# EAGLE board BlackBoard-Artemis-ATP-Panel (EAGLE 9.4.0), part 1 of 4
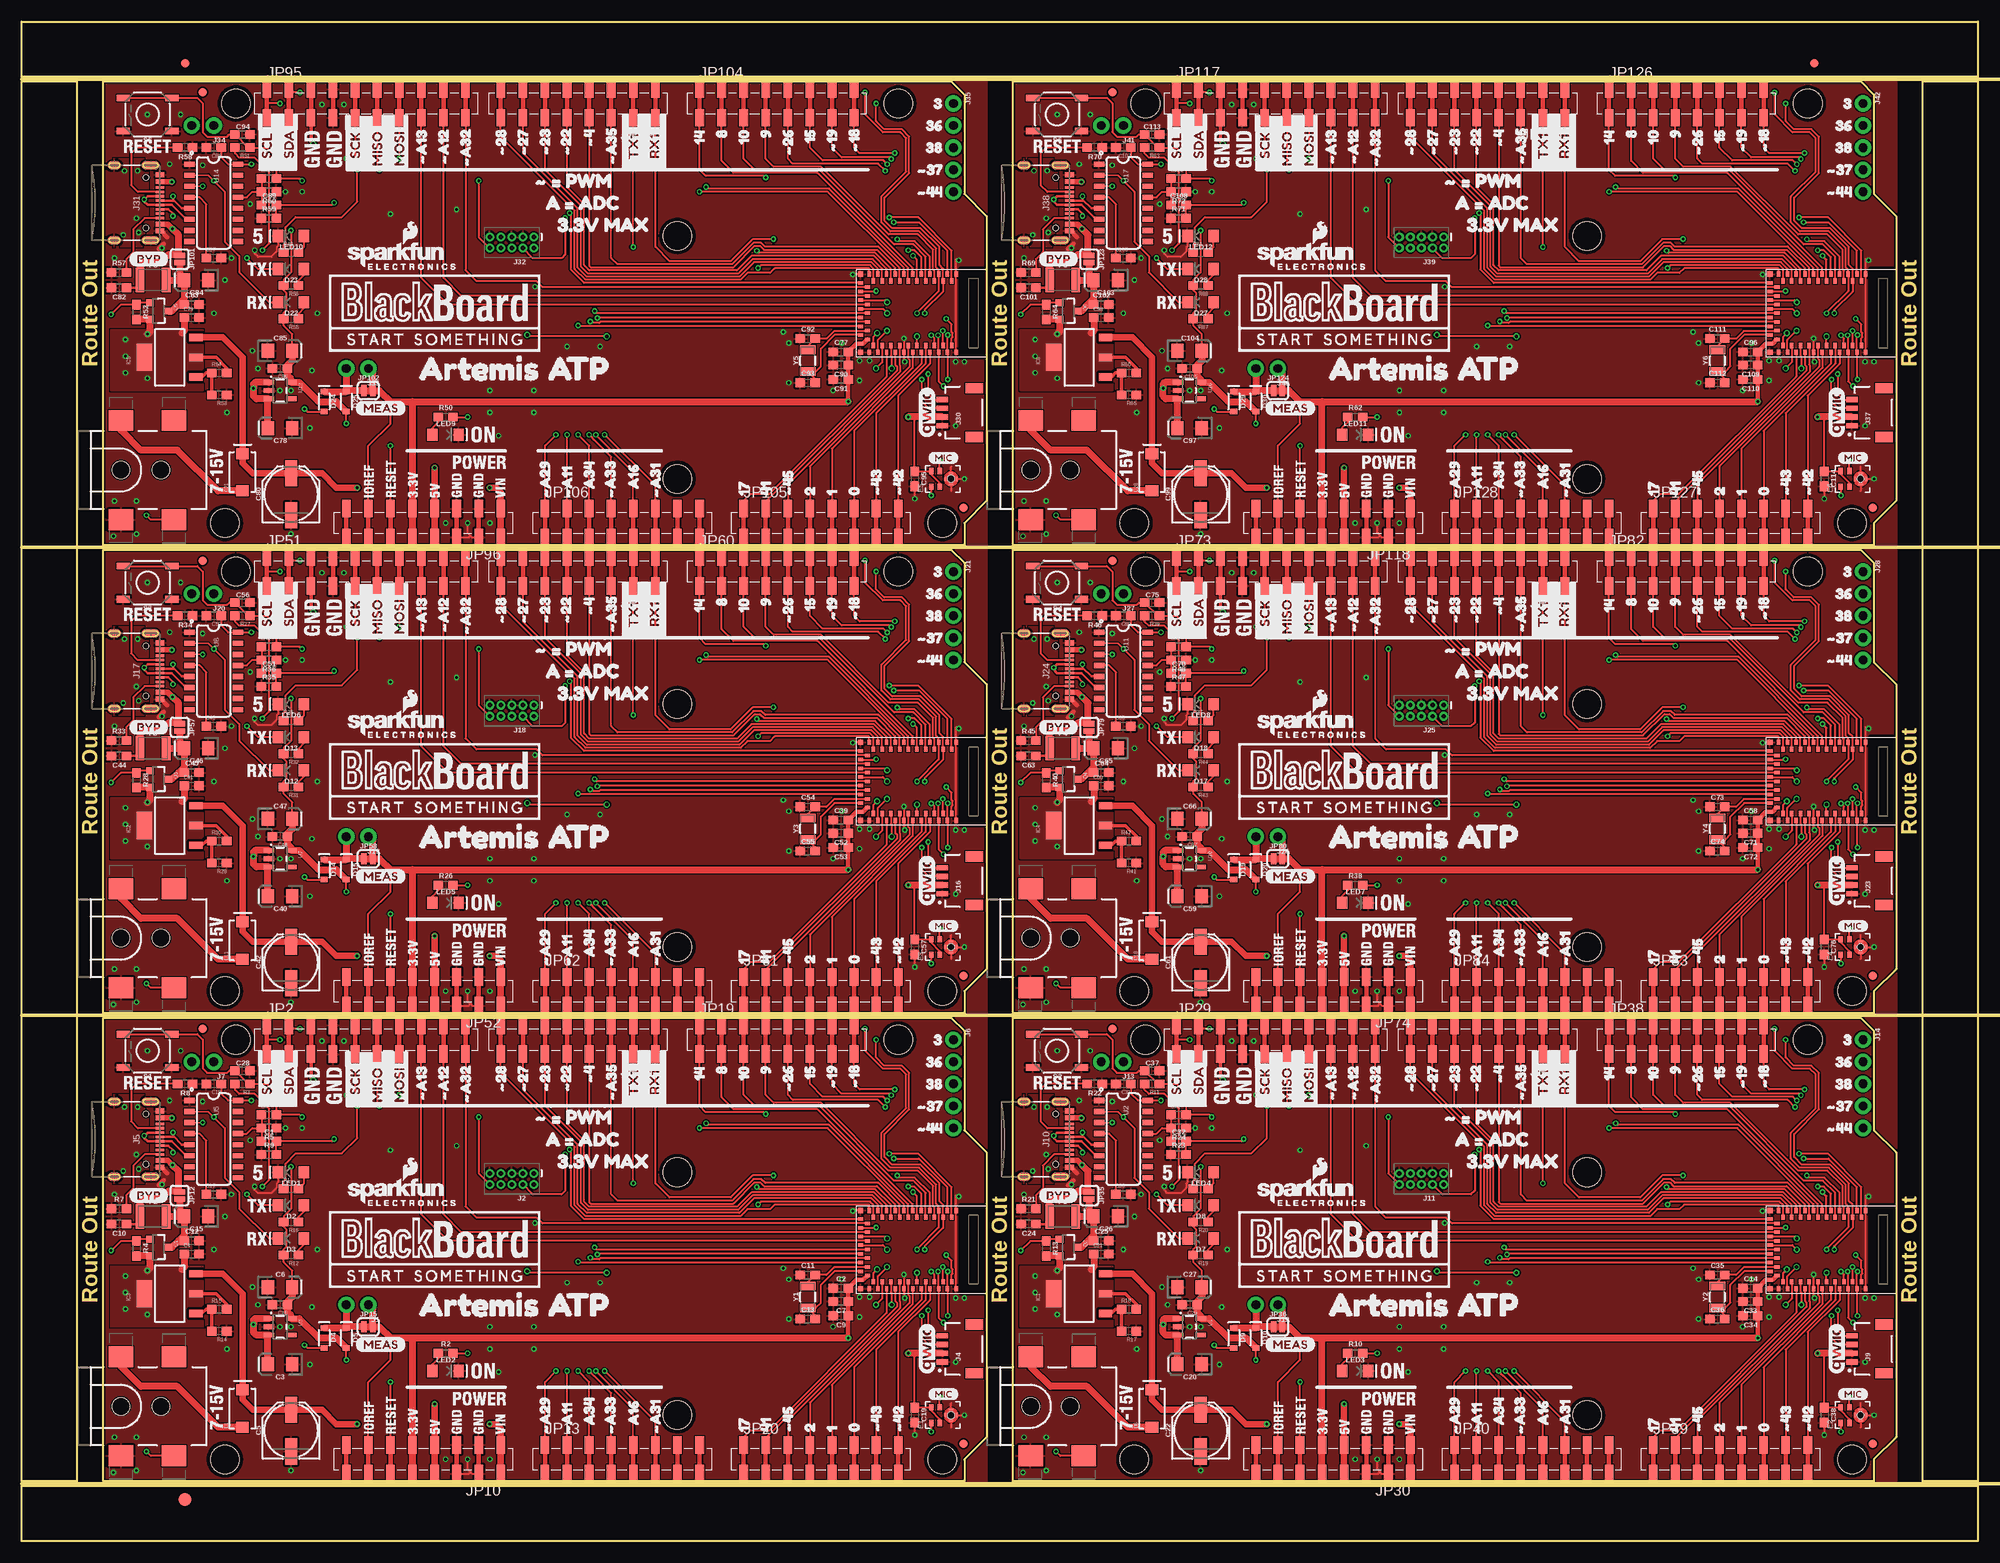
[diagram p0: board, top side]
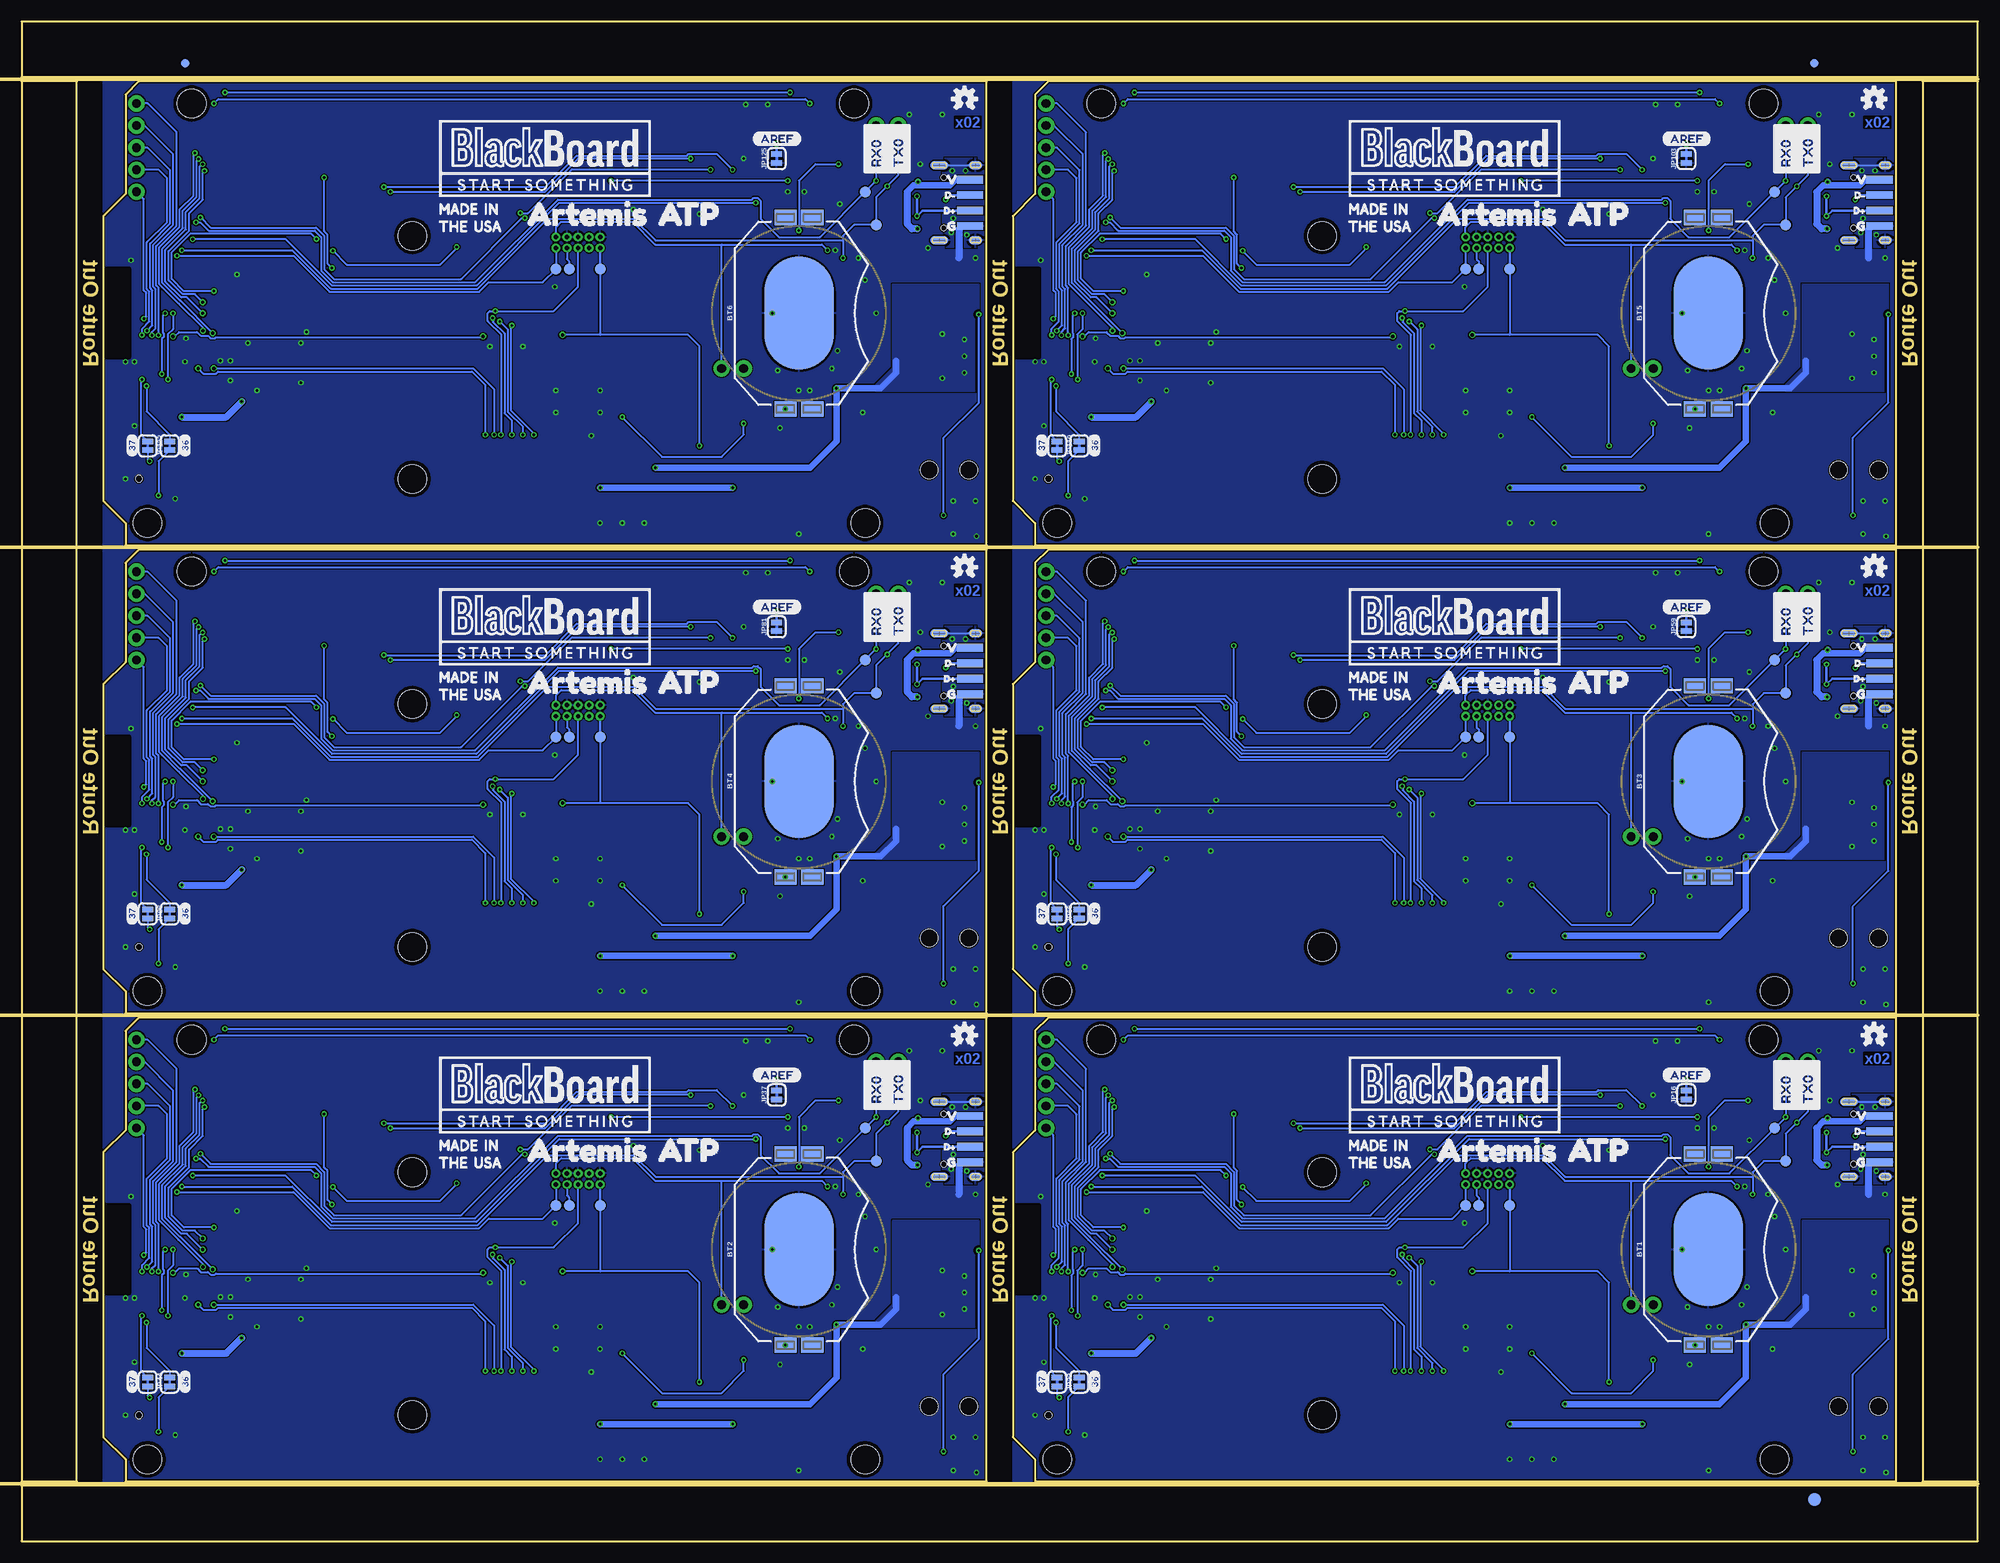
[diagram p1: board, bottom side, seen from below]

Size 225.04 x 174.75 mm. Coordinates in mm from the lower left corner, seen from the top.
Outline: 9.4,60.2 106.93,60.2 108.46,58.67 108.46,47.24 111,44.7 111,11.94 108.46,9.4 108.46,6.86 9.4,6.86 9.4,60.2
Outline: 114.05,60.2 211.58,60.2 213.11,58.67 213.11,47.24 215.65,44.7 215.65,11.94 213.11,9.4 213.11,6.86 114.05,6.86 114.05,60.2
Outline: 9.4,114.05 106.93,114.05 108.46,112.52 108.46,101.09 111,98.55 111,65.79 108.46,63.25 108.46,60.71 9.4,60.71 9.4,114.05
Outline: 114.05,114.05 211.58,114.05 213.11,112.52 213.11,101.09 215.65,98.55 215.65,65.79 213.11,63.25 213.11,60.71 114.05,60.71 114.05,114.05
Outline: 9.4,167.89 106.93,167.89 108.46,166.37 108.46,154.94 111,152.4 111,119.63 108.46,117.09 108.46,114.55 9.4,114.55 9.4,167.89
Outline: 114.05,167.89 211.58,167.89 213.11,166.37 213.11,154.94 215.65,152.4 215.65,119.63 213.11,117.09 213.11,114.55 114.05,114.55 114.05,167.89
Outline: 0,6.35 225.04,6.35 225.04,0 0,0 0,6.35
Outline: 218.69,167.89 225.04,167.89 225.04,6.86 218.69,6.86 218.69,167.89
Outline: 0,174.75 225.04,174.75 225.04,168.4 0,168.4 0,174.75
Outline: 0,167.89 6.35,167.89 6.35,6.86 0,6.86 0,167.89
Copper layers (1*16): Top 0.035mm / dielectric 1.5mm / Bottom 0.035mm
Design rules "SparkFun-2-layer-PCBWay-LIMIT": minimum track width 6mil, minimum drill 0.3mm, track to track 6mil, track to pad 6mil, pad to pad 6mil, via to via 6mil, smd to smd 6mil, copper to edge 6mil, drill to drill 6mil, minimum pad ring 6mil, minimum via ring 6mil, stop-mask expansion 4mil, vias tented up to drill 25mil, thermal gap 10mil
Net classes: 0 default: width 0 mm, drill 0 mm; 1 power: width 0.762 mm
tRestrict: area 108,28.5 to 111.2,38.6; area 212.7,28.5 to 215.8,38.6; area 108,82.3 to 111.2,92.5; area 212.7,82.3 to 215.8,92.5; area 108,136.2 to 111.2,146.3; area 212.7,136.2 to 215.8,146.3
bRestrict: area 108,28.5 to 111.2,38.6; area 212.7,28.5 to 215.8,38.6; area 108,82.3 to 111.2,92.5; area 212.7,82.3 to 215.8,92.5; area 108,136.2 to 111.2,146.3; area 212.7,136.2 to 215.8,146.3
vRestrict: area 10,29.2 to 11.4,37.5; area 15.1,30 to 16.8,37.5; area 57.3,17.7 to 57.9,18.2; area 59.8,17.5 to 60.3,18.4; area 20.7,36.2 to 22.1,38.5; area 9.7,19.8 to 18.8,31.9; area 114.7,29.2 to 116.1,37.5; area 119.8,30 to 121.4,37.5; area 161.9,17.7 to 162.6,18.2; area 164.5,17.5 to 165,18.4; area 125.3,36.2 to 126.7,38.5; area 114.3,19.8 to 123.4,31.9; area 10,83.1 to 11.4,91.3; area 15.1,83.8 to 16.8,91.3; area 57.3,71.5 to 57.9,72; area 59.8,71.4 to 60.3,72.3; area 20.7,90 to 22.1,92.3; area 9.7,73.7 to 18.8,85.7; area 114.7,83.1 to 116.1,91.3; area 119.8,83.8 to 121.4,91.3; area 161.9,71.5 to 162.6,72; area 164.5,71.4 to 165,72.3; area 125.3,90 to 126.7,92.3; area 114.3,73.7 to 123.4,85.7; area 10,136.9 to 11.4,145.2; area 15.1,137.7 to 16.8,145.2; area 57.3,125.3 to 57.9,125.9; area 59.8,125.2 to 60.3,126.1; area 20.7,143.9 to 22.1,146.2; area 9.7,127.5 to 18.8,139.6; area 114.7,136.9 to 116.1,145.2; area 119.8,137.7 to 121.4,145.2; area 161.9,125.3 to 162.6,125.9; area 164.5,125.2 to 165,126.1; area 125.3,143.9 to 126.7,146.2; area 114.3,127.5 to 123.4,139.6
Milling: 4 lines

## Footprints (pad centres in the part's own frame; a part is rotated, then mirrored left to right if it is on the bottom)
BATTCON_20MM_4LEGS_OVERPASTE = smd 1.778 x 2.54: 1 -11,1.55; 3 11,1.55; P$1 -11,-1.55; P$2 11,-1.55 | smd 13 x 8: 2 0,0
0603 = smd 1.1 x 1: 1 -0.85,0; 2 0.85,0
EIA3216 = smd 1.4 x 1.6: + 1.4,0; - -1.4,0
PANASONIC_D = smd 3 x 1.4: + 2.4,0; - -2.4,0
SMA-DIODE = smd 1.27 x 1.47: A -2.15,0; C 2.15,0
LED-1206 = smd 1.2 x 1.4: A -1.5,0; C 1.5,0
SOD-323 = smd 0.63 x 0.83: A 1.15,0; C -1.15,0
SPH0641LM4H-1_MICROPHONE = smd 0.725 x 0.522: 1 -0.9,1.3; 2 -0.9,0.3; 4 0.9,0.3; 5 0.9,1.3 | smd 0.5 x 0.2: 3 0,-1.65; 8 0,-0.35 | smd 0.2 x 0.5: 6 -0.65,-1; 7 0.65,-1 | hole 0.8: 0,-1
FIDUCIAL-1X2 = smd 1 x 1: 1 0,0
FIDUCIAL-1.5X3 = smd 1.5 x 1.5: 1 0,0
1210 = smd 1 x 2.8: 1 -1.5,0; 2 1.5,0
SOT223-ALT1 = smd 0.838 x 1.524: 1 -2.271,-3.02; 2 0,-3.02; 3 2.288,-3.02 | smd 3.124 x 1.778: 4 0,2.921
1X02_NO_SILK = drill 1.016 pad 1.88: 1 0,0; 2 2.54,0
2X5-PTH-1.27MM-NO_SILK = drill 0.508 pad 1: 1 -2.54,-0.635; 2 -2.54,0.635; 3 -1.27,-0.635; 4 -1.27,0.635; 5 0,-0.635; 6 0,0.635; 7 1.27,-0.635; 8 1.27,0.635; 9 2.54,-0.635; 10 2.54,0.635
POWER_JACK_SMD_OVERPASTE_TOE = smd 2.8 x 2.4: GND 0,-5.7; P$4 6.1,-5.7; VIN0 0,5.7; VIN1 6.1,5.7 | hole 2.032: 0,0; 4.572,0
JST04_1MM_RA = smd 0.6 x 1.35: 1 -1.5,0; 2 -0.5,0; 3 0.5,0; 4 1.5,0 | smd 1.2 x 2: NC1 2.8,-3.675; NC2 -2.8,-3.675
USB-C-16P = smd 0.3 x 1.016: A5 -1.25,0.154; A6 -0.25,0.154; A7 0.25,0.154; A8 1.25,0.154; B5 1.75,0.154; B6 0.75,0.154; B7 -0.75,0.154; B8 -1.75,0.154 | smd 0.6 x 1.016: GND -3.225,0.154; GND2 3.225,0.154 | smd 1 x 2.1: SHLD1 -4.32,-0.915; SHLD2 4.32,-0.915 | smd 1 x 2.1 bottom: SHLD3 -4.32,-0.915; SHLD4 4.32,-0.915 | smd 1 x 1.6: SHLD5 -4.32,-5.095; SHLD8 4.32,-5.095 | smd 1 x 1.6 bottom: SHLD6 -4.32,-5.095; SHLD7 4.32,-5.095 | smd 0.55 x 1.016: VBUS1 -2.45,0.154; VBUS2 2.45,0.154 | hole 0.65: -2.89,-1.445; 2.89,-1.445
1X05_NO_SILK = drill 1.016 pad 1.88: 1 0,0; 2 2.54,0; 3 5.08,0; 4 7.62,0; 5 10.16,0
1X10_SMD_COMBINED = smd 1 x 2: 1A 0,1.65; 1B 0,-1.65; 2A 2.54,1.65; 2B 2.54,-1.65; 3A 5.08,1.65; 3B 5.08,-1.65; 4A 7.62,1.65; 4B 7.62,-1.65; 5A 10.16,1.65; 5B 10.16,-1.65; 6A 12.7,1.65; 6B 12.7,-1.65; 7A 15.24,1.65; 7B 15.24,-1.65; 8A 17.78,1.65; 8B 17.78,-1.65; 9A 20.32,1.65; 9B 20.32,-1.65; 10A 22.86,1.65; 10B 22.86,-1.65
STAND-OFF = hole 3.302: 0,0
1X08_SMD_COMBINED = smd 1 x 2: 1A 0,1.65; 1B 0,-1.65; 2A 2.54,-1.65; 2B 2.54,1.65; 3A 5.08,1.65; 3B 5.08,-1.65; 4A 7.62,-1.65; 4B 7.62,1.65; 5A 10.16,1.65; 5B 10.16,-1.65; 6A 12.7,-1.65; 6B 12.7,1.65; 7A 15.24,1.65; 7B 15.24,-1.65; 8A 17.78,-1.65; 8B 17.78,1.65
SMT-JUMPER_2_NO_SILK = smd 0.635 x 1.27: 1 -0.406,0; 2 0.406,0
USB-SOLDER-PADS = smd 3 x 0.9: D+ 0,-0.889; D- 0,0.889; GND 0,-2.667; VBUS 0,2.667
SMT-JUMPER_2_NC_TRACE_SILK = smd 0.635 x 1.27: 1 -0.508,0; 2 0.508,0
SOT23-3 = smd 0.8 x 0.9: 1 -0.95,-1; 2 0.95,-1; 3 0,1.1
TACTILE_SWITCH_SMD_5.2MM = smd 1.524 x 0.762: 1 -2.794,1.905; 2 2.794,1.905; 3 -2.794,-1.905; 4 2.794,-1.905
PAD.03X.05 = smd 1.27 x 1.27: P$1 0,0
SOT23-5 = smd 0.55 x 1.2: 1 -0.95,-1.3; 2 0,-1.3; 3 0.95,-1.3; 4 0.95,1.3; 5 -0.95,1.3
SO016 = smd 0.6 x 1.2: 1 -4.445,-2.8; 2 -3.175,-2.8; 3 -1.905,-2.8; 4 -0.635,-2.8; 5 0.635,-2.8; 6 1.905,-2.8; 7 3.175,-2.8; 8 4.445,-2.8; 9 4.445,2.8; 10 3.175,2.8; 11 1.905,2.8; 12 0.635,2.8; 13 -0.635,2.8; 14 -1.905,2.8; 15 -3.175,2.8; 16 -4.445,2.8
ARTEMIS_FP = smd 0.4 x 0.6: AD16 -4,-3.7; BOOT 1.5,4.5; D0 0.5,-4.5; D1 -0.5,-4.5; D2 -1,-3.7; D3 2,-3.7; D7 -1.5,4.5; D8 -0.5,4.5; D9 2,3.7; D10 1,3.7; D14 -5,3.7; D17 -3.5,-4.5; D36 2.5,-4.5; D38 3,-3.7; D40 2.5,4.5; D41 -2.5,-4.5; GND@1 4.5,4.5; GND@39 -5.5,-4.5; GND@47 -1.5,-4.5; GND@59 4.5,-4.5; RXI-0 3.5,4.5; SWDCK 4,3.7; SWDIO 0,3.7; TXO-0 0.5,4.5; ~AD31 -3,-3.7; ~AD35 -2,3.7; ~D4 -2.5,4.5; ~D5 -1,3.7; ~D18 -4.5,-4.5; ~D19 -5,-3.7; ~D22 -3.5,4.5; ~D23 -4,3.7; ~D24 -3,3.7; ~D27 -4.5,4.5; ~D28 -5.5,4.5; ~D37 3.5,-4.5; ~D39 3,3.7; ~D42 1.5,-4.5; ~D43 1,-3.7; ~D44 4,-3.7; ~D45 -2,-3.7; ~RST 0,-3.7 | smd 0.6 x 0.4: AD34 -6.5,-0.5; D15 -6.5,0.5; VDD@36 -5.7,-3; VDD@37 -6.5,-3.5; XI -6.5,-2.5; XO -5.7,-2; ~AD11 -5.7,-1; ~AD12 -5.7,2; ~AD13 -5.7,1; ~AD29 -6.5,-1.5; ~AD32 -5.7,3; ~AD33/SWO -5.7,0; ~D6 -6.5,3.5; ~D25 -6.5,2.5; ~D26 -6.5,1.5 | smd 0.6 x 0.6: GND@22 -6.5,4.5; GND@38 -6.5,-4.5
CRYSTAL-SMD-3.2X1.5MM = smd 1 x 1.8: P$1 -1.25,0; P$2 1.25,0

## Placement (x,y rotation side)
BT1  CR2032  [BATTCON_20MM_4LEGS_OVERPASTE]  30.99,33.53 90 bottom
BT2  CR2032  [BATTCON_20MM_4LEGS_OVERPASTE]  135.64,33.53 90 bottom
BT3  CR2032  [BATTCON_20MM_4LEGS_OVERPASTE]  30.99,87.38 90 bottom
BT4  CR2032  [BATTCON_20MM_4LEGS_OVERPASTE]  135.64,87.38 90 bottom
BT5  CR2032  [BATTCON_20MM_4LEGS_OVERPASTE]  30.99,141.22 90 bottom
BT6  CR2032  [BATTCON_20MM_4LEGS_OVERPASTE]  135.64,141.22 90 bottom
C1  2.2uF  [0603]  28.45,45.97 0 top
C2  0.1uF  [0603]  94.23,29.08 0 top
C3  10uF  [EIA3216]  29.72,20.32 180 top
C4  0.1uF  [0603]  19.56,33.02 0 top
C5  47uF  [PANASONIC_D]  30.99,12.7 90 top
C6  10uF  [EIA3216]  29.72,29.21 0 top
C7  10uF  [0603]  94.23,27.56 180 top
C8  0.1uF  [0603]  28.45,49.02 0 top
C9  1.0uF  [0603]  94.23,25.91 180 top
C10  0.1uF  [0603]  11.18,36.45 180 top
C11  15pF  [0603]  90.42,30.61 0 top
C12  0.1uF  [0603]  19.56,34.54 0 top
C13  15pF  [0603]  90.42,25.53 0 top
C14  0.1uF  [0603]  198.88,29.08 0 top
C15  10uF  [EIA3216]  20.07,37.34 180 top
C16  1.0uF  [0603]  29.72,27.18 180 top
C17  10nF  [0603]  22.1,39.88 0 top
C18  0.1uF  [0603]  22.1,52.58 180 top
C19  0.1uF  [0603]  102.74,14.48 270 top
C20  10uF  [EIA3216]  134.37,20.32 180 top
C21  0.1uF  [0603]  124.21,33.02 0 top
C22  47uF  [PANASONIC_D]  135.64,12.7 90 top
C23  0.1uF  [0603]  133.1,49.02 0 top
C24  0.1uF  [0603]  115.82,36.45 180 top
C25  0.1uF  [0603]  124.21,34.54 0 top
C26  10uF  [EIA3216]  124.71,37.34 180 top
C27  10uF  [EIA3216]  134.37,29.21 0 top
C28  1nF  [0603]  25.4,54.1 0 top
C29  1.0uF  [0603]  134.37,27.18 180 top
C30  10nF  [0603]  126.75,39.88 0 top
C31  0.1uF  [0603]  126.75,52.58 180 top
C32  2.2uF  [0603]  133.1,45.97 0 top
C33  10uF  [0603]  198.88,27.56 180 top
C34  1.0uF  [0603]  198.88,25.91 180 top
C35  15pF  [0603]  195.07,30.61 0 top
C36  15pF  [0603]  195.07,25.53 0 top
C37  1nF  [0603]  130.05,54.1 0 top
C38  0.1uF  [0603]  207.39,14.48 270 top
C39  0.1uF  [0603]  94.23,82.93 0 top
C40  10uF  [EIA3216]  29.72,74.17 180 top
C41  0.1uF  [0603]  19.56,86.87 0 top
C42  47uF  [PANASONIC_D]  30.99,66.55 90 top
C43  0.1uF  [0603]  28.45,102.87 0 top
C44  0.1uF  [0603]  11.18,90.3 180 top
C45  0.1uF  [0603]  19.56,88.39 0 top
C46  10uF  [EIA3216]  20.07,91.19 180 top
C47  10uF  [EIA3216]  29.72,83.06 0 top
C48  1.0uF  [0603]  29.72,81.03 180 top
C49  10nF  [0603]  22.1,93.73 0 top
C50  0.1uF  [0603]  22.1,106.43 180 top
C51  2.2uF  [0603]  28.45,99.82 0 top
C52  10uF  [0603]  94.23,81.41 180 top
C53  1.0uF  [0603]  94.23,79.76 180 top
C54  15pF  [0603]  90.42,84.45 0 top
C55  15pF  [0603]  90.42,79.38 0 top
C56  1nF  [0603]  25.4,107.95 0 top
C57  0.1uF  [0603]  102.74,68.33 270 top
C58  0.1uF  [0603]  198.88,82.93 0 top
C59  10uF  [EIA3216]  134.37,74.17 180 top
C60  0.1uF  [0603]  124.21,86.87 0 top
C61  47uF  [PANASONIC_D]  135.64,66.55 90 top
C62  0.1uF  [0603]  133.1,102.87 0 top
C63  0.1uF  [0603]  115.82,90.3 180 top
C64  0.1uF  [0603]  124.21,88.39 0 top
C65  10uF  [EIA3216]  124.71,91.19 180 top
C66  10uF  [EIA3216]  134.37,83.06 0 top
C67  1.0uF  [0603]  134.37,81.03 180 top
C68  10nF  [0603]  126.75,93.73 0 top
C69  0.1uF  [0603]  126.75,106.43 180 top
C70  2.2uF  [0603]  133.1,99.82 0 top
C71  10uF  [0603]  198.88,81.41 180 top
C72  1.0uF  [0603]  198.88,79.76 180 top
C73  15pF  [0603]  195.07,84.45 0 top
C74  15pF  [0603]  195.07,79.38 0 top
C75  1nF  [0603]  130.05,107.95 0 top
C76  0.1uF  [0603]  207.39,68.33 270 top
C77  0.1uF  [0603]  94.23,136.78 0 top
C78  10uF  [EIA3216]  29.72,128.02 180 top
C79  0.1uF  [0603]  19.56,140.72 0 top
C80  47uF  [PANASONIC_D]  30.99,120.4 90 top
C81  0.1uF  [0603]  28.45,156.72 0 top
C82  0.1uF  [0603]  11.18,144.15 180 top
C83  0.1uF  [0603]  19.56,142.24 0 top
C84  10uF  [EIA3216]  20.07,145.03 180 top
C85  10uF  [EIA3216]  29.72,136.91 0 top
C86  1.0uF  [0603]  29.72,134.87 180 top
C87  10nF  [0603]  22.1,147.57 0 top
C88  0.1uF  [0603]  22.1,160.27 180 top
C89  2.2uF  [0603]  28.45,153.67 0 top
C90  10uF  [0603]  94.23,135.25 180 top
C91  1.0uF  [0603]  94.23,133.6 180 top
C92  15pF  [0603]  90.42,138.3 0 top
C93  15pF  [0603]  90.42,133.22 0 top
C94  1nF  [0603]  25.4,161.8 0 top
C95  0.1uF  [0603]  102.74,122.17 270 top
C96  0.1uF  [0603]  198.88,136.78 0 top
C97  10uF  [EIA3216]  134.37,128.02 180 top
C98  0.1uF  [0603]  124.21,140.72 0 top
C99  47uF  [PANASONIC_D]  135.64,120.4 90 top
C100  0.1uF  [0603]  133.1,156.72 0 top
C101  0.1uF  [0603]  115.82,144.15 180 top
C102  0.1uF  [0603]  124.21,142.24 0 top
C103  10uF  [EIA3216]  124.71,145.03 180 top
C104  10uF  [EIA3216]  134.37,136.91 0 top
C105  1.0uF  [0603]  134.37,134.87 180 top
C106  10nF  [0603]  126.75,147.57 0 top
C107  0.1uF  [0603]  126.75,160.27 180 top
C108  2.2uF  [0603]  133.1,153.67 0 top
C109  10uF  [0603]  198.88,135.25 180 top
C110  1.0uF  [0603]  198.88,133.6 180 top
C111  15pF  [0603]  195.07,138.3 0 top
C112  15pF  [0603]  195.07,133.22 0 top
C113  1nF  [0603]  130.05,161.8 0 top
C114  0.1uF  [0603]  207.39,122.17 270 top
D1  1A/40V/500mV  [SMA-DIODE]  25.4,15.24 90 top
D2  GREEN  [LED-1206]  30.99,38.61 180 top
D3  Yellow  [LED-1206]  30.99,34.8 180 top
D4  1A/23V/620mV  [SOD-323]  34.8,23.37 270 top
D5  1A/23V/620mV  [SOD-323]  37.34,23.37 270 top
D6  1A/40V/500mV  [SMA-DIODE]  130.05,15.24 90 top
D7  Yellow  [LED-1206]  135.64,34.8 180 top
D8  GREEN  [LED-1206]  135.64,38.61 180 top
D9  1A/23V/620mV  [SOD-323]  139.45,23.37 270 top
D10  1A/23V/620mV  [SOD-323]  141.99,23.37 270 top
D11  1A/40V/500mV  [SMA-DIODE]  25.4,69.09 90 top
D12  Yellow  [LED-1206]  30.99,88.65 180 top
D13  GREEN  [LED-1206]  30.99,92.46 180 top
D14  1A/23V/620mV  [SOD-323]  34.8,77.22 270 top
D15  1A/23V/620mV  [SOD-323]  37.34,77.22 270 top
D16  1A/40V/500mV  [SMA-DIODE]  130.05,69.09 90 top
D17  Yellow  [LED-1206]  135.64,88.65 180 top
D18  GREEN  [LED-1206]  135.64,92.46 180 top
D19  1A/23V/620mV  [SOD-323]  139.45,77.22 270 top
D20  1A/23V/620mV  [SOD-323]  141.99,77.22 270 top
D21  1A/40V/500mV  [SMA-DIODE]  25.4,122.94 90 top
D22  Yellow  [LED-1206]  30.99,142.49 180 top
D23  GREEN  [LED-1206]  30.99,146.3 180 top
D24  1A/23V/620mV  [SOD-323]  34.8,131.06 270 top
D25  1A/23V/620mV  [SOD-323]  37.34,131.06 270 top
D26  1A/40V/500mV  [SMA-DIODE]  130.05,122.94 90 top
D27  Yellow  [LED-1206]  135.64,142.49 180 top
D28  GREEN  [LED-1206]  135.64,146.3 180 top
D29  1A/23V/620mV  [SOD-323]  139.45,131.06 270 top
D30  1A/23V/620mV  [SOD-323]  141.99,131.06 270 top
E1  SPH0641LM4H-1  [SPH0641LM4H-1_MICROPHONE]  105.92,14.48 90 top
E2  SPH0641LM4H-1  [SPH0641LM4H-1_MICROPHONE]  210.57,14.48 90 top
E3  SPH0641LM4H-1  [SPH0641LM4H-1_MICROPHONE]  105.92,68.33 90 top
E4  SPH0641LM4H-1  [SPH0641LM4H-1_MICROPHONE]  210.57,68.33 90 top
E5  SPH0641LM4H-1  [SPH0641LM4H-1_MICROPHONE]  105.92,122.17 90 top
E6  SPH0641LM4H-1  [SPH0641LM4H-1_MICROPHONE]  210.57,122.17 90 top
E$1  [FIDUCIAL-1X2]  18.8,169.99 0 top
E$2  [FIDUCIAL-1X2]  18.8,169.99 0 bottom
E$3  [FIDUCIAL-1X2]  206.25,169.99 0 top
E$4  [FIDUCIAL-1X2]  206.25,169.99 0 bottom
E$5  [FIDUCIAL-1.5X3]  18.8,4.76 0 top
E$6  [FIDUCIAL-1.5X3]  18.8,4.76 0 bottom
F1  6V/2A  [1210]  119.76,37.34 0 top
F2  6V/2A  [1210]  15.11,37.34 0 top
F3  6V/2A  [1210]  15.11,91.19 0 top
F4  6V/2A  [1210]  119.76,91.19 0 top
F5  6V/2A  [1210]  15.11,145.03 0 top
F6  6V/2A  [1210]  119.76,145.03 0 top
FRAME1  FRAME-LETTERNO_PACKAGE  [DUMMY]  150.88,28.45 270 bottom
FRAME2  FRAME-LETTERNO_PACKAGE  [DUMMY]  46.23,28.45 270 bottom
FRAME3  FRAME-LETTERNO_PACKAGE  [DUMMY]  46.23,82.3 270 bottom
FRAME4  FRAME-LETTERNO_PACKAGE  [DUMMY]  150.88,82.3 270 bottom
FRAME5  FRAME-LETTERNO_PACKAGE  [DUMMY]  46.23,136.14 270 bottom
FRAME6  FRAME-LETTERNO_PACKAGE  [DUMMY]  150.88,136.14 270 bottom
IC1  LM1117  [SOT223-ALT1]  121.67,28.45 90 top
IC2  LM1117  [SOT223-ALT1]  17.02,82.3 90 top
IC3  LM1117  [SOT223-ALT1]  17.02,28.45 90 top
IC4  LM1117  [SOT223-ALT1]  121.67,82.3 90 top
IC5  LM1117  [SOT223-ALT1]  17.02,136.14 90 top
IC6  LM1117  [SOT223-ALT1]  121.67,136.14 90 top
J1  [1X02_NO_SILK]  39.88,27.18 180 top
J2  CORTEX_DEBUG  [2X5-PTH-1.27MM-NO_SILK]  56.39,41.66 180 top
J3  POWER_JACKTOE  [POWER_JACK_SMD_OVERPASTE_TOE]  11.43,15.49 0 top
J4  [JST04_1MM_RA]  105.92,22.1 90 top
J5  USB-C  [USB-C-16P]  15.75,46.23 270 top
J6  [1X05_NO_SILK]  107.19,57.66 270 top
J7  [1X02_NO_SILK]  22.1,55.12 180 top
J8  POWER_JACKTOE  [POWER_JACK_SMD_OVERPASTE_TOE]  116.08,15.49 0 top
J9  [JST04_1MM_RA]  210.57,22.1 90 top
J10  USB-C  [USB-C-16P]  120.4,46.23 270 top
J11  CORTEX_DEBUG  [2X5-PTH-1.27MM-NO_SILK]  161.04,41.66 180 top
J12  [1X02_NO_SILK]  144.53,27.18 180 top
J13  [1X02_NO_SILK]  126.75,55.12 180 top
J14  [1X05_NO_SILK]  211.84,57.66 270 top
J15  POWER_JACKTOE  [POWER_JACK_SMD_OVERPASTE_TOE]  11.43,69.34 0 top
J16  [JST04_1MM_RA]  105.92,75.95 90 top
J17  USB-C  [USB-C-16P]  15.75,100.08 270 top
J18  CORTEX_DEBUG  [2X5-PTH-1.27MM-NO_SILK]  56.39,95.5 180 top
J19  [1X02_NO_SILK]  39.88,81.03 180 top
J20  [1X02_NO_SILK]  22.1,108.97 180 top
J21  [1X05_NO_SILK]  107.19,111.51 270 top
J22  POWER_JACKTOE  [POWER_JACK_SMD_OVERPASTE_TOE]  116.08,69.34 0 top
J23  [JST04_1MM_RA]  210.57,75.95 90 top
J24  USB-C  [USB-C-16P]  120.4,100.08 270 top
J25  CORTEX_DEBUG  [2X5-PTH-1.27MM-NO_SILK]  161.04,95.5 180 top
J26  [1X02_NO_SILK]  144.53,81.03 180 top
J27  [1X02_NO_SILK]  126.75,108.97 180 top
J28  [1X05_NO_SILK]  211.84,111.51 270 top
J29  POWER_JACKTOE  [POWER_JACK_SMD_OVERPASTE_TOE]  11.43,123.19 0 top
J30  [JST04_1MM_RA]  105.92,129.79 90 top
J31  USB-C  [USB-C-16P]  15.75,153.92 270 top
J32  CORTEX_DEBUG  [2X5-PTH-1.27MM-NO_SILK]  56.39,149.35 180 top
J33  [1X02_NO_SILK]  39.88,134.87 180 top
J34  [1X02_NO_SILK]  22.1,162.81 180 top
J35  [1X05_NO_SILK]  107.19,165.35 270 top
J36  POWER_JACKTOE  [POWER_JACK_SMD_OVERPASTE_TOE]  116.08,123.19 0 top
J37  [JST04_1MM_RA]  210.57,129.79 90 top
J38  USB-C  [USB-C-16P]  120.4,153.92 270 top
J39  CORTEX_DEBUG  [2X5-PTH-1.27MM-NO_SILK]  161.04,149.35 180 top
J40  [1X02_NO_SILK]  144.53,134.87 180 top
J41  [1X02_NO_SILK]  126.75,162.81 180 top
J42  [1X05_NO_SILK]  211.84,165.35 270 top
JP1  SFE_LOGO_NAME.1_INCH  [SFE_LOGO_NAME_.1]  43.05,40.26 0 top
JP2  M10SMD_COMBO  [1X10_SMD_COMBINED]  28.19,57.66 0 top
JP3  STAND-OFF  [STAND-OFF]  23.37,9.4 0 top
JP4  STAND-OFF  [STAND-OFF]  75.44,14.48 0 top
JP5  STAND-OFF  [STAND-OFF]  75.44,42.42 0 top
JP6  STAND-OFF  [STAND-OFF]  24.64,57.66 0 top
JP7  SFE_LOGO_FLAME.1_INCH  [SFE_LOGO_FLAME_.1]  44.7,42.8 0 top
JP8  FIDUCIAL1X2  [FIDUCIAL-1X2]  108.33,11.18 0 top
JP9  FIDUCIAL1X2  [FIDUCIAL-1X2]  20.83,58.93 0 top
JP10  [1X08_SMD_COMBINED]  55.12,9.4 180 top
JP11  JP11  [1X08_SMD_COMBINED]  72.9,57.66 180 top
JP12  [SMT-JUMPER_2_NO_SILK]  18.16,39.75 270 top
JP13  JP11  [1X08_SMD_COMBINED]  60.2,9.4 0 top
JP14  USB_SOLDER_PADS  [USB-SOLDER-PADS]  11.3,46.23 0 bottom
JP15  [SMT-JUMPER_2_NC_TRACE_SILK]  39.88,24.64 0 top
JP16  [SMT-JUMPER_2_NC_TRACE_SILK]  33.53,51.31 90 bottom
JP17  STAND-OFF  [STAND-OFF]  105.92,9.4 0 top
JP18  STAND-OFF  [STAND-OFF]  100.84,57.66 0 top
JP19  JP11  [1X08_SMD_COMBINED]  77.98,57.66 0 top
JP20  JP11  [1X08_SMD_COMBINED]  83.06,9.4 0 top
JP21  [SMT-JUMPER_2_NC_TRACE_SILK]  103.38,18.29 270 bottom
JP22  [SMT-JUMPER_2_NC_TRACE_SILK]  105.92,18.29 270 bottom
JP23  STAND-OFF  [STAND-OFF]  128.02,9.4 0 top
JP24  STAND-OFF  [STAND-OFF]  180.09,14.48 0 top
JP25  STAND-OFF  [STAND-OFF]  180.09,42.42 0 top
JP26  STAND-OFF  [STAND-OFF]  129.29,57.66 0 top
JP27  FIDUCIAL1X2  [FIDUCIAL-1X2]  212.98,11.18 0 top
JP28  FIDUCIAL1X2  [FIDUCIAL-1X2]  125.48,58.93 0 top
JP29  M10SMD_COMBO  [1X10_SMD_COMBINED]  132.84,57.66 0 top
JP30  [1X08_SMD_COMBINED]  159.77,9.4 180 top
JP31  SFE_LOGO_NAME.1_INCH  [SFE_LOGO_NAME_.1]  147.7,40.26 0 top
JP32  SFE_LOGO_FLAME.1_INCH  [SFE_LOGO_FLAME_.1]  149.35,42.8 0 top
JP33  JP11  [1X08_SMD_COMBINED]  177.55,57.66 180 top
JP34  USB_SOLDER_PADS  [USB-SOLDER-PADS]  115.95,46.23 0 bottom
JP35  [SMT-JUMPER_2_NO_SILK]  122.81,39.75 270 top
JP36  [SMT-JUMPER_2_NC_TRACE_SILK]  144.53,24.64 0 top
JP37  [SMT-JUMPER_2_NC_TRACE_SILK]  138.18,51.31 90 bottom
JP38  JP11  [1X08_SMD_COMBINED]  182.63,57.66 0 top
JP39  JP11  [1X08_SMD_COMBINED]  187.71,9.4 0 top
JP40  JP11  [1X08_SMD_COMBINED]  164.85,9.4 0 top
JP41  STAND-OFF  [STAND-OFF]  210.57,9.4 0 top
JP42  STAND-OFF  [STAND-OFF]  205.49,57.66 0 top
JP43  [SMT-JUMPER_2_NC_TRACE_SILK]  208.03,18.29 270 bottom
JP44  [SMT-JUMPER_2_NC_TRACE_SILK]  210.57,18.29 270 bottom
JP45  STAND-OFF  [STAND-OFF]  23.37,63.25 0 top
JP46  STAND-OFF  [STAND-OFF]  75.44,68.33 0 top
JP47  STAND-OFF  [STAND-OFF]  75.44,96.27 0 top
JP48  STAND-OFF  [STAND-OFF]  24.64,111.51 0 top
JP49  FIDUCIAL1X2  [FIDUCIAL-1X2]  108.33,65.02 0 top
JP50  FIDUCIAL1X2  [FIDUCIAL-1X2]  20.83,112.78 0 top
JP51  M10SMD_COMBO  [1X10_SMD_COMBINED]  28.19,111.51 0 top
JP52  [1X08_SMD_COMBINED]  55.12,63.25 180 top
JP53  SFE_LOGO_NAME.1_INCH  [SFE_LOGO_NAME_.1]  43.05,94.11 0 top
JP54  SFE_LOGO_FLAME.1_INCH  [SFE_LOGO_FLAME_.1]  44.7,96.65 0 top
JP55  JP11  [1X08_SMD_COMBINED]  72.9,111.51 180 top
JP56  USB_SOLDER_PADS  [USB-SOLDER-PADS]  11.3,100.08 0 bottom
JP57  [SMT-JUMPER_2_NO_SILK]  18.16,93.6 270 top
JP58  [SMT-JUMPER_2_NC_TRACE_SILK]  39.88,78.49 0 top
JP59  [SMT-JUMPER_2_NC_TRACE_SILK]  33.53,105.16 90 bottom
JP60  JP11  [1X08_SMD_COMBINED]  77.98,111.51 0 top
JP61  JP11  [1X08_SMD_COMBINED]  83.06,63.25 0 top
JP62  JP11  [1X08_SMD_COMBINED]  60.2,63.25 0 top
JP63  STAND-OFF  [STAND-OFF]  105.92,63.25 0 top
JP64  STAND-OFF  [STAND-OFF]  100.84,111.51 0 top
JP65  [SMT-JUMPER_2_NC_TRACE_SILK]  103.38,72.14 270 bottom
JP66  [SMT-JUMPER_2_NC_TRACE_SILK]  105.92,72.14 270 bottom
JP67  STAND-OFF  [STAND-OFF]  128.02,63.25 0 top
JP68  STAND-OFF  [STAND-OFF]  180.09,68.33 0 top
JP69  STAND-OFF  [STAND-OFF]  180.09,96.27 0 top
JP70  STAND-OFF  [STAND-OFF]  129.29,111.51 0 top
JP71  FIDUCIAL1X2  [FIDUCIAL-1X2]  212.98,65.02 0 top
JP72  FIDUCIAL1X2  [FIDUCIAL-1X2]  125.48,112.78 0 top
JP73  M10SMD_COMBO  [1X10_SMD_COMBINED]  132.84,111.51 0 top
JP74  [1X08_SMD_COMBINED]  159.77,63.25 180 top
JP75  SFE_LOGO_NAME.1_INCH  [SFE_LOGO_NAME_.1]  147.7,94.11 0 top
JP76  SFE_LOGO_FLAME.1_INCH  [SFE_LOGO_FLAME_.1]  149.35,96.65 0 top
JP77  JP11  [1X08_SMD_COMBINED]  177.55,111.51 180 top
JP78  USB_SOLDER_PADS  [USB-SOLDER-PADS]  115.95,100.08 0 bottom
JP79  [SMT-JUMPER_2_NO_SILK]  122.81,93.6 270 top
JP80  [SMT-JUMPER_2_NC_TRACE_SILK]  144.53,78.49 0 top
JP81  [SMT-JUMPER_2_NC_TRACE_SILK]  138.18,105.16 90 bottom
JP82  JP11  [1X08_SMD_COMBINED]  182.63,111.51 0 top
JP83  JP11  [1X08_SMD_COMBINED]  187.71,63.25 0 top
JP84  JP11  [1X08_SMD_COMBINED]  164.85,63.25 0 top
JP85  STAND-OFF  [STAND-OFF]  210.57,63.25 0 top
JP86  STAND-OFF  [STAND-OFF]  205.49,111.51 0 top
JP87  [SMT-JUMPER_2_NC_TRACE_SILK]  208.03,72.14 270 bottom
JP88  [SMT-JUMPER_2_NC_TRACE_SILK]  210.57,72.14 270 bottom
JP89  STAND-OFF  [STAND-OFF]  23.37,117.09 0 top
JP90  STAND-OFF  [STAND-OFF]  75.44,122.17 0 top
JP91  STAND-OFF  [STAND-OFF]  75.44,150.11 0 top
JP92  STAND-OFF  [STAND-OFF]  24.64,165.35 0 top
JP93  FIDUCIAL1X2  [FIDUCIAL-1X2]  108.33,118.87 0 top
JP94  FIDUCIAL1X2  [FIDUCIAL-1X2]  20.83,166.62 0 top
JP95  M10SMD_COMBO  [1X10_SMD_COMBINED]  28.19,165.35 0 top
JP96  [1X08_SMD_COMBINED]  55.12,117.09 180 top
JP97  SFE_LOGO_NAME.1_INCH  [SFE_LOGO_NAME_.1]  43.05,147.96 0 top
JP98  SFE_LOGO_FLAME.1_INCH  [SFE_LOGO_FLAME_.1]  44.7,150.5 0 top
JP99  JP11  [1X08_SMD_COMBINED]  72.9,165.35 180 top
JP100  USB_SOLDER_PADS  [USB-SOLDER-PADS]  11.3,153.92 0 bottom
JP101  [SMT-JUMPER_2_NO_SILK]  18.16,147.45 270 top
JP102  [SMT-JUMPER_2_NC_TRACE_SILK]  39.88,132.33 0 top
JP103  [SMT-JUMPER_2_NC_TRACE_SILK]  33.53,159 90 bottom
JP104  JP11  [1X08_SMD_COMBINED]  77.98,165.35 0 top
JP105  JP11  [1X08_SMD_COMBINED]  83.06,117.09 0 top
JP106  JP11  [1X08_SMD_COMBINED]  60.2,117.09 0 top
JP107  STAND-OFF  [STAND-OFF]  105.92,117.09 0 top
JP108  STAND-OFF  [STAND-OFF]  100.84,165.35 0 top
JP109  [SMT-JUMPER_2_NC_TRACE_SILK]  103.38,125.98 270 bottom
JP110  [SMT-JUMPER_2_NC_TRACE_SILK]  105.92,125.98 270 bottom
JP111  STAND-OFF  [STAND-OFF]  128.02,117.09 0 top
JP112  STAND-OFF  [STAND-OFF]  180.09,122.17 0 top
JP113  STAND-OFF  [STAND-OFF]  180.09,150.11 0 top
JP114  STAND-OFF  [STAND-OFF]  129.29,165.35 0 top
JP115  FIDUCIAL1X2  [FIDUCIAL-1X2]  212.98,118.87 0 top
JP116  FIDUCIAL1X2  [FIDUCIAL-1X2]  125.48,166.62 0 top
JP117  M10SMD_COMBO  [1X10_SMD_COMBINED]  132.84,165.35 0 top
JP118  [1X08_SMD_COMBINED]  159.77,117.09 180 top
JP119  SFE_LOGO_NAME.1_INCH  [SFE_LOGO_NAME_.1]  147.7,147.96 0 top
JP120  SFE_LOGO_FLAME.1_INCH  [SFE_LOGO_FLAME_.1]  149.35,150.5 0 top
JP121  JP11  [1X08_SMD_COMBINED]  177.55,165.35 180 top
JP122  USB_SOLDER_PADS  [USB-SOLDER-PADS]  115.95,153.92 0 bottom
JP123  [SMT-JUMPER_2_NO_SILK]  122.81,147.45 270 top
JP124  [SMT-JUMPER_2_NC_TRACE_SILK]  144.53,132.33 0 top
JP125  [SMT-JUMPER_2_NC_TRACE_SILK]  138.18,159 90 bottom
JP126  JP11  [1X08_SMD_COMBINED]  182.63,165.35 0 top
JP127  JP11  [1X08_SMD_COMBINED]  187.71,117.09 0 top
JP128  JP11  [1X08_SMD_COMBINED]  164.85,117.09 0 top
JP129  STAND-OFF  [STAND-OFF]  210.57,117.09 0 top
JP130  STAND-OFF  [STAND-OFF]  205.49,165.35 0 top
JP131  [SMT-JUMPER_2_NC_TRACE_SILK]  208.03,125.98 270 bottom
JP132  [SMT-JUMPER_2_NC_TRACE_SILK]  210.57,125.98 270 bottom
LED1  BLUE  [LED-1206]  30.99,42.42 180 top
LED2  GREEN  [LED-1206]  48.77,19.56 0 top
LED3  GREEN  [LED-1206]  153.42,19.56 0 top
LED4  BLUE  [LED-1206]  135.64,42.42 180 top
LED5  GREEN  [LED-1206]  48.77,73.41 0 top
LED6  BLUE  [LED-1206]  30.99,96.27 180 top
LED7  GREEN  [LED-1206]  153.42,73.41 0 top
LED8  BLUE  [LED-1206]  135.64,96.27 180 top
LED9  GREEN  [LED-1206]  48.77,127.25 0 top
LED10  BLUE  [LED-1206]  30.99,150.11 180 top
LED11  GREEN  [LED-1206]  153.42,127.25 0 top
LED12  BLUE  [LED-1206]  135.64,150.11 180 top
Q1  1.1A/60V/600mΩ  [SOT23-3]  15.75,33.78 270 top
Q2  1.1A/60V/600mΩ  [SOT23-3]  120.4,33.78 270 top
Q3  1.1A/60V/600mΩ  [SOT23-3]  15.75,87.63 270 top
Q4  1.1A/60V/600mΩ  [SOT23-3]  120.4,87.63 270 top
Q5  1.1A/60V/600mΩ  [SOT23-3]  15.75,141.48 270 top
Q6  1.1A/60V/600mΩ  [SOT23-3]  120.4,141.48 270 top
R1  4.7k  [0603]  30.99,40.51 0 top
R2  10k  [0603]  48.77,21.59 0 top
R3  100k  [0603]  25.4,52.58 180 top
R4  10k  [0603]  13.21,33.66 270 top
R5  100k  [0603]  28.45,47.5 180 top
R6  4.7k  [0603]  135.64,40.51 0 top
R7  5.1k  [0603]  11.18,38.23 0 top
R8  5.1k  [0603]  18.8,52.58 180 top
R9  10k  [0603]  28.45,44.45 0 top
R10  10k  [0603]  153.42,21.59 0 top
R11  100k  [0603]  130.05,52.58 180 top
R12  4.7k  [0603]  30.99,32.89 180 top
R13  10k  [0603]  117.86,33.66 270 top
R14  715  [0603]  22.73,24.13 180 top
R15  240  [0603]  22.73,26.67 0 top
R16  4.7k  [0603]  30.99,36.7 180 top
R17  715  [0603]  127.38,24.13 180 top
R18  240  [0603]  127.38,26.67 0 top
R19  4.7k  [0603]  135.64,32.89 180 top
R20  4.7k  [0603]  135.64,36.7 180 top
R21  5.1k  [0603]  115.82,38.23 0 top
R22  5.1k  [0603]  123.44,52.58 180 top
R23  10k  [0603]  133.1,44.45 0 top
R24  100k  [0603]  133.1,47.5 180 top
R25  4.7k  [0603]  30.99,94.36 0 top
R26  10k  [0603]  48.77,75.44 0 top
R27  100k  [0603]  25.4,106.43 180 top
R28  10k  [0603]  13.21,87.5 270 top
R29  715  [0603]  22.73,77.98 180 top
R30  240  [0603]  22.73,80.52 0 top
R31  4.7k  [0603]  30.99,86.74 180 top
R32  4.7k  [0603]  30.99,90.55 180 top
R33  5.1k  [0603]  11.18,92.08 0 top
R34  5.1k  [0603]  18.8,106.43 180 top
R35  10k  [0603]  28.45,98.3 0 top
R36  100k  [0603]  28.45,101.35 180 top
R37  4.7k  [0603]  135.64,94.36 0 top
R38  10k  [0603]  153.42,75.44 0 top
R39  100k  [0603]  130.05,106.43 180 top
R40  10k  [0603]  117.86,87.5 270 top
R41  715  [0603]  127.38,77.98 180 top
R42  240  [0603]  127.38,80.52 0 top
R43  4.7k  [0603]  135.64,86.74 180 top
R44  4.7k  [0603]  135.64,90.55 180 top
R45  5.1k  [0603]  115.82,92.08 0 top
R46  5.1k  [0603]  123.44,106.43 180 top
R47  10k  [0603]  133.1,98.3 0 top
R48  100k  [0603]  133.1,101.35 180 top
R49  4.7k  [0603]  30.99,148.21 0 top
R50  10k  [0603]  48.77,129.29 0 top
R51  100k  [0603]  25.4,160.27 180 top
R52  10k  [0603]  13.21,141.35 270 top
R53  715  [0603]  22.73,131.83 180 top
R54  240  [0603]  22.73,134.37 0 top
R55  4.7k  [0603]  30.99,140.59 180 top
R56  4.7k  [0603]  30.99,144.4 180 top
R57  5.1k  [0603]  11.18,145.92 0 top
R58  5.1k  [0603]  18.8,160.27 180 top
R59  10k  [0603]  28.45,152.15 0 top
R60  100k  [0603]  28.45,155.19 180 top
R61  4.7k  [0603]  135.64,148.21 0 top
R62  10k  [0603]  153.42,129.29 0 top
R63  100k  [0603]  130.05,160.27 180 top
R64  10k  [0603]  117.86,141.35 270 top
R65  715  [0603]  127.38,131.83 180 top
R66  240  [0603]  127.38,134.37 0 top
R67  4.7k  [0603]  135.64,140.59 180 top
R68  4.7k  [0603]  135.64,144.4 180 top
R69  5.1k  [0603]  115.82,145.92 0 top
R70  5.1k  [0603]  123.44,160.27 180 top
R71  10k  [0603]  133.1,152.15 0 top
R72  100k  [0603]  133.1,155.19 180 top
S1  [TACTILE_SWITCH_SMD_5.2MM]  14.48,56.39 180 top
S2  [TACTILE_SWITCH_SMD_5.2MM]  119.13,56.39 180 top
S3  [TACTILE_SWITCH_SMD_5.2MM]  14.48,110.24 180 top
S4  [TACTILE_SWITCH_SMD_5.2MM]  119.13,110.24 180 top
S5  [TACTILE_SWITCH_SMD_5.2MM]  14.48,164.08 180 top
S6  [TACTILE_SWITCH_SMD_5.2MM]  119.13,164.08 180 top
TP1  [PAD.03X.05]  57.4,38.61 90 bottom
TP2  [PAD.03X.05]  58.93,38.61 90 bottom
TP3  [PAD.03X.05]  53.85,38.61 0 bottom
TP4  [PAD.03X.05]  162.05,38.61 90 bottom
TP5  TEST-POINT3X5  [PAD.03X.05]  23.37,47.5 90 bottom
TP6  TEST-POINT3X5  [PAD.03X.05]  22.1,43.69 90 bottom
TP7  [PAD.03X.05]  163.58,38.61 90 bottom
TP8  TEST-POINT3X5  [PAD.03X.05]  128.02,47.5 90 bottom
TP9  TEST-POINT3X5  [PAD.03X.05]  126.75,43.69 90 bottom
TP10  [PAD.03X.05]  158.5,38.61 0 bottom
TP11  [PAD.03X.05]  57.4,92.46 90 bottom
TP12  [PAD.03X.05]  58.93,92.46 90 bottom
TP13  TEST-POINT3X5  [PAD.03X.05]  23.37,101.35 90 bottom
TP14  TEST-POINT3X5  [PAD.03X.05]  22.1,97.54 90 bottom
TP15  [PAD.03X.05]  53.85,92.46 0 bottom
TP16  [PAD.03X.05]  162.05,92.46 90 bottom
TP17  [PAD.03X.05]  163.58,92.46 90 bottom
TP18  TEST-POINT3X5  [PAD.03X.05]  128.02,101.35 90 bottom
TP19  TEST-POINT3X5  [PAD.03X.05]  126.75,97.54 90 bottom
TP20  [PAD.03X.05]  158.5,92.46 0 bottom
TP21  [PAD.03X.05]  57.4,146.3 90 bottom
TP22  [PAD.03X.05]  58.93,146.3 90 bottom
TP23  TEST-POINT3X5  [PAD.03X.05]  23.37,155.19 90 bottom
TP24  TEST-POINT3X5  [PAD.03X.05]  22.1,151.38 90 bottom
TP25  [PAD.03X.05]  53.85,146.3 0 bottom
TP26  [PAD.03X.05]  162.05,146.3 90 bottom
TP27  [PAD.03X.05]  163.58,146.3 90 bottom
TP28  TEST-POINT3X5  [PAD.03X.05]  128.02,155.19 90 bottom
TP29  TEST-POINT3X5  [PAD.03X.05]  126.75,151.38 90 bottom
TP30  [PAD.03X.05]  158.5,146.3 0 bottom
U1  AP2112-3.3V  [SOT23-5]  134.37,24.64 270 top
U2  CH340C  [SO016]  126.75,46.23 270 top
U3  AP2112-3.3V  [SOT23-5]  29.72,24.64 270 top
U4  ARTEMIS_MODULESMD  [ARTEMIS_FP]  103,33.53 0 top
U5  CH340C  [SO016]  22.1,46.23 270 top
U6  ARTEMIS_MODULESMD  [ARTEMIS_FP]  207.65,33.53 0 top
U7  AP2112-3.3V  [SOT23-5]  29.72,78.49 270 top
U8  CH340C  [SO016]  22.1,100.08 270 top
U9  ARTEMIS_MODULESMD  [ARTEMIS_FP]  103,87.38 0 top
U10  AP2112-3.3V  [SOT23-5]  134.37,78.49 270 top
U11  CH340C  [SO016]  126.75,100.08 270 top
U12  ARTEMIS_MODULESMD  [ARTEMIS_FP]  207.65,87.38 0 top
U13  AP2112-3.3V  [SOT23-5]  29.72,132.33 270 top
U14  CH340C  [SO016]  22.1,153.92 270 top
U15  ARTEMIS_MODULESMD  [ARTEMIS_FP]  103,141.22 0 top
U16  AP2112-3.3V  [SOT23-5]  134.37,132.33 270 top
U17  CH340C  [SO016]  126.75,153.92 270 top
U18  ARTEMIS_MODULESMD  [ARTEMIS_FP]  207.65,141.22 0 top
U$1  [BLACKBOARDLOGO#PNG]  47.5,33.53 0 top
U$2  [D#3]  14.99,45.34 0 bottom
U$3  [BLACKBOARDLOGO#PNG]  60.2,51.31 0 bottom
U$4  [MADEINUSA#PNG]  68.83,44.45 0 bottom
U$5  OSHW-LOGOS  [OSHW-LOGO-S]  116.59,58.17 0 bottom
U$6  [BLACKBOARDLOGO#PNG]  152.15,33.53 0 top
U$7  [BLACKBOARDLOGO#PNG]  164.85,51.31 0 bottom
U$8  [MADEINUSA#PNG]  173.48,44.45 0 bottom
U$9  [QWIIC_COPYRIGHT_SMALL]  104.14,22.1 90 top
U$10  [D#4]  14.86,47.12 0 bottom
U$11  [G1]  14.86,43.56 0 bottom
U$12  [V0]  14.86,48.89 0 bottom
U$13  [#A332]  67.69,11.3 90 top
U$14  [ARTEMIS0]  43.43,27.18 0 top
U$15  [ARTEMIS0]  64.52,44.96 0 bottom
U$16  OSHW-LOGOS  [OSHW-LOGO-S]  11.94,58.17 0 bottom
U$17  [A160]  70.36,12.32 90 top
U$18  [SCL1]  28.19,50.29 90 top
U$19  [#48]  65.28,51.69 90 top
U$20  [AREF2]  36.32,53.59 0 bottom
U$21  [#229]  62.61,50.67 90 top
U$22  [SDA0]  30.73,50.29 90 top
U$23  [#3711]  101.98,50.04 0 top
U$24  [#187]  95.76,51.05 90 top
U$25  [#2310]  60.2,50.67 90 top
U$26  [#2711]  57.66,50.67 90 top
U$27  [#2812]  55.12,50.67 90 top
U$28  [ATP1]  49.4,44.96 0 bottom
U$29  [#A113]  62.74,11.3 90 top
U$30  [#A294]  60.2,11.3 90 top
U$31  [#A310]  72.9,11.3 90 top
U$32  [#196]  93.22,51.05 90 top
U$33  [#A357]  67.82,49.66 90 top
U$34  [#A1214]  48.51,49.66 90 top
U$35  [#A1315]  45.97,49.66 90 top
U$36  [#A3213]  51.05,49.4 90 top
U$37  [#264]  88.14,50.67 90 top
U$38  [A342]  65.28,12.32 90 top
U$39  [#4213]  100.84,11.56 90 top
U$40  [#4314]  98.3,11.56 90 top
U$41  [#4412]  101.98,47.5 0 top
U$42  [#4518]  88.14,11.56 90 top
U$43  [015]  95.76,11.56 90 top
U$44  [38]  103.89,57.66 0 top
U$45  [81]  80.52,52.7 90 top
U$46  [93]  85.6,52.7 90 top
U$47  [MISO8]  40.89,49.4 90 top
U$48  [MOSI7]  43.43,49.4 90 top
U$49  [RX01]  22.1,49.28 90 bottom
U$50  [SCK9]  38.35,50.29 90 top
U$51  [102]  83.06,51.94 90 top
U$52  [116]  93.22,11.56 90 top
U$53  [TX00]  19.56,49.28 90 bottom
U$54  [140]  77.98,51.94 90 top
U$55  [155]  90.68,52.07 90 top
U$56  [217]  90.68,11.56 90 top
U$57  [369]  103,55.12 0 top
U$58  [1720]  83.06,11.56 90 top
U$59  [3810]  103,52.58 0 top
U$60  [4119]  85.6,11.56 90 top
U$61  [ATP1]  58.29,27.18 0 top
U$62  [MIC0]  104.27,16.89 0 top
U$63  [364]  101.6,17.02 90 bottom
U$64  [373]  107.7,17.02 90 bottom
U$65  [QWIIC_COPYRIGHT_SMALL]  208.79,22.1 90 top
U$66  [#_#_PWM7]  57.66,48.77 0 top
U$67  [3#3V_MAX2]  60.2,43.69 0 top
U$68  [BYP0]  12.32,39.75 0 top
U$69  [A_#_ADC6]  58.93,46.23 0 top
U$70  [MEAS3]  38.35,22.61 0 top
U$71  [RX11]  72.77,50.29 90 top
U$72  [TX10]  70.36,50.16 90 top
U$73  [G1]  119.51,43.56 0 bottom
U$74  [V0]  119.51,48.89 0 bottom
U$75  [D#3]  119.63,45.34 0 bottom
U$76  [D#4]  119.51,47.12 0 bottom
U$77  [ARTEMIS0]  148.08,27.18 0 top
U$78  [ARTEMIS0]  169.16,44.96 0 bottom
U$79  [A160]  175.01,12.32 90 top
U$80  [#48]  169.93,51.69 90 top
U$81  [#229]  167.26,50.67 90 top
U$82  [#2310]  164.85,50.67 90 top
U$83  [#2711]  162.31,50.67 90 top
U$84  [#2812]  159.77,50.67 90 top
U$85  [#A113]  167.39,11.3 90 top
U$86  [#A294]  164.85,11.3 90 top
U$87  [#A310]  177.55,11.3 90 top
U$88  [#A357]  172.47,49.66 90 top
U$89  [#A1214]  153.16,49.66 90 top
U$90  [#A1315]  150.62,49.66 90 top
U$91  [#A3213]  155.7,49.4 90 top
U$92  [A342]  169.93,12.32 90 top
U$93  [MISO8]  145.54,49.4 90 top
U$94  [MOSI7]  148.08,49.4 90 top
U$95  [SCK9]  143,50.29 90 top
U$96  [#_#_PWM7]  162.31,48.77 0 top
U$97  [3#3V_MAX2]  164.85,43.69 0 top
U$98  [A_#_ADC6]  163.58,46.23 0 top
U$99  [MEAS3]  143,22.61 0 top
U$100  [RX11]  177.42,50.29 90 top
U$101  [TX10]  175.01,50.16 90 top
U$102  [RX01]  126.75,49.28 90 bottom
U$103  [TX00]  124.21,49.28 90 bottom
U$104  [AREF2]  140.97,53.59 0 bottom
U$105  [SCL1]  132.84,50.29 90 top
U$106  [SDA0]  135.38,50.29 90 top
U$107  [#187]  200.41,51.05 90 top
U$108  [#196]  197.87,51.05 90 top
U$109  [#264]  192.79,50.67 90 top
U$110  [#3711]  206.63,50.04 0 top
U$111  [#4213]  205.49,11.56 90 top
U$112  [#4314]  202.95,11.56 90 top
U$113  [#4412]  206.63,47.5 0 top
U$114  [#4518]  192.79,11.56 90 top
U$115  [015]  200.41,11.56 90 top
U$116  [38]  208.53,57.66 0 top
U$117  [81]  185.17,52.7 90 top
U$118  [93]  190.25,52.7 90 top
U$119  [102]  187.71,51.94 90 top
U$120  [116]  197.87,11.56 90 top
U$121  [140]  182.63,51.94 90 top
U$122  [155]  195.33,52.07 90 top
U$123  [217]  195.33,11.56 90 top
U$124  [369]  207.65,55.12 0 top
U$125  [1720]  187.71,11.56 90 top
U$126  [3810]  207.65,52.58 0 top
U$127  [4119]  190.25,11.56 90 top
U$128  [ATP1]  162.94,27.18 0 top
U$129  [MIC0]  208.91,16.89 0 top
U$130  [364]  206.25,17.02 90 bottom
U$131  [373]  212.34,17.02 90 bottom
U$132  [BYP0]  116.97,39.75 0 top
U$133  [#A332]  172.34,11.3 90 top
U$134  [ATP1]  154.05,44.96 0 bottom
U$135  OSHW-LOGOS  [OSHW-LOGO-S]  11.94,112.01 0 bottom
U$136  [BLACKBOARDLOGO#PNG]  47.5,87.38 0 top
U$137  [BLACKBOARDLOGO#PNG]  60.2,105.16 0 bottom
U$138  [MADEINUSA#PNG]  68.83,98.3 0 bottom
U$139  [QWIIC_COPYRIGHT_SMALL]  104.14,75.95 90 top
U$140  [G1]  14.86,97.41 0 bottom
U$141  [V0]  14.86,102.74 0 bottom
U$142  [D#3]  14.99,99.19 0 bottom
U$143  [D#4]  14.86,100.97 0 bottom
U$144  [ARTEMIS0]  43.43,81.03 0 top
U$145  [ARTEMIS0]  64.52,98.81 0 bottom
U$146  [A160]  70.36,66.17 90 top
U$147  [#48]  65.28,105.54 90 top
U$148  [#229]  62.61,104.52 90 top
U$149  [#2310]  60.2,104.52 90 top
U$150  [#2711]  57.66,104.52 90 top
U$151  [#2812]  55.12,104.52 90 top
U$152  [#A113]  62.74,65.15 90 top
U$153  [#A294]  60.2,65.15 90 top
U$154  [#A310]  72.9,65.15 90 top
U$155  [#A357]  67.82,103.51 90 top
U$156  [#A1214]  48.51,103.51 90 top
U$157  [#A1315]  45.97,103.51 90 top
U$158  [#A3213]  51.05,103.25 90 top
U$159  [A342]  65.28,66.17 90 top
U$160  [MISO8]  40.89,103.25 90 top
U$161  [MOSI7]  43.43,103.25 90 top
U$162  [SCK9]  38.35,104.14 90 top
U$163  [#_#_PWM7]  57.66,102.62 0 top
U$164  [3#3V_MAX2]  60.2,97.54 0 top
U$165  [A_#_ADC6]  58.93,100.08 0 top
U$166  [MEAS3]  38.35,76.45 0 top
U$167  [RX11]  72.77,104.14 90 top
U$168  [TX10]  70.36,104.01 90 top
U$169  [RX01]  22.1,103.12 90 bottom
U$170  [TX00]  19.56,103.12 90 bottom
U$171  [AREF2]  36.32,107.44 0 bottom
U$172  [SCL1]  28.19,104.14 90 top
U$173  [SDA0]  30.73,104.14 90 top
U$174  [#187]  95.76,104.9 90 top
U$175  [#196]  93.22,104.9 90 top
U$176  [#264]  88.14,104.52 90 top
U$177  [#3711]  101.98,103.89 0 top
U$178  [#4213]  100.84,65.41 90 top
U$179  [#4314]  98.3,65.41 90 top
U$180  [#4412]  101.98,101.35 0 top
U$181  [#4518]  88.14,65.41 90 top
U$182  [015]  95.76,65.41 90 top
U$183  [38]  103.89,111.51 0 top
U$184  [81]  80.52,106.55 90 top
U$185  [93]  85.6,106.55 90 top
U$186  [102]  83.06,105.79 90 top
U$187  [116]  93.22,65.41 90 top
U$188  [140]  77.98,105.79 90 top
U$189  [155]  90.68,105.92 90 top
U$190  [217]  90.68,65.41 90 top
U$191  [369]  103,108.97 0 top
U$192  [1720]  83.06,65.41 90 top
U$193  [3810]  103,106.43 0 top
U$194  [4119]  85.6,65.41 90 top
U$195  [ATP1]  58.29,81.03 0 top
U$196  [MIC0]  104.27,70.74 0 top
U$197  [364]  101.6,70.87 90 bottom
U$198  [373]  107.7,70.87 90 bottom
U$199  [BYP0]  12.32,93.6 0 top
U$200  [#A332]  67.69,65.15 90 top
U$201  [ATP1]  49.4,98.81 0 bottom
U$202  OSHW-LOGOS  [OSHW-LOGO-S]  116.59,112.01 0 bottom
U$203  [BLACKBOARDLOGO#PNG]  152.15,87.38 0 top
U$204  [BLACKBOARDLOGO#PNG]  164.85,105.16 0 bottom
U$205  [MADEINUSA#PNG]  173.48,98.3 0 bottom
U$206  [QWIIC_COPYRIGHT_SMALL]  208.79,75.95 90 top
U$207  [G1]  119.51,97.41 0 bottom
U$208  [V0]  119.51,102.74 0 bottom
U$209  [D#3]  119.63,99.19 0 bottom
U$210  [D#4]  119.51,100.97 0 bottom
U$211  [ARTEMIS0]  148.08,81.03 0 top
U$212  [ARTEMIS0]  169.16,98.81 0 bottom
U$213  [A160]  175.01,66.17 90 top
U$214  [#48]  169.93,105.54 90 top
U$215  [#229]  167.26,104.52 90 top
U$216  [#2310]  164.85,104.52 90 top
U$217  [#2711]  162.31,104.52 90 top
U$218  [#2812]  159.77,104.52 90 top
U$219  [#A113]  167.39,65.15 90 top
U$220  [#A294]  164.85,65.15 90 top
U$221  [#A310]  177.55,65.15 90 top
U$222  [#A357]  172.47,103.51 90 top
U$223  [#A1214]  153.16,103.51 90 top
U$224  [#A1315]  150.62,103.51 90 top
U$225  [#A3213]  155.7,103.25 90 top
U$226  [A342]  169.93,66.17 90 top
U$227  [MISO8]  145.54,103.25 90 top
U$228  [MOSI7]  148.08,103.25 90 top
U$229  [SCK9]  143,104.14 90 top
U$230  [#_#_PWM7]  162.31,102.62 0 top
U$231  [3#3V_MAX2]  164.85,97.54 0 top
U$232  [A_#_ADC6]  163.58,100.08 0 top
U$233  [MEAS3]  143,76.45 0 top
U$234  [RX11]  177.42,104.14 90 top
U$235  [TX10]  175.01,104.01 90 top
U$236  [RX01]  126.75,103.12 90 bottom
U$237  [TX00]  124.21,103.12 90 bottom
U$238  [AREF2]  140.97,107.44 0 bottom
U$239  [SCL1]  132.84,104.14 90 top
U$240  [SDA0]  135.38,104.14 90 top
U$241  [#187]  200.41,104.9 90 top
U$242  [#196]  197.87,104.9 90 top
U$243  [#264]  192.79,104.52 90 top
U$244  [#3711]  206.63,103.89 0 top
U$245  [#4213]  205.49,65.41 90 top
U$246  [#4314]  202.95,65.41 90 top
U$247  [#4412]  206.63,101.35 0 top
U$248  [#4518]  192.79,65.41 90 top
U$249  [015]  200.41,65.41 90 top
U$250  [38]  208.53,111.51 0 top
U$251  [81]  185.17,106.55 90 top
U$252  [93]  190.25,106.55 90 top
U$253  [102]  187.71,105.79 90 top
U$254  [116]  197.87,65.41 90 top
U$255  [140]  182.63,105.79 90 top
U$256  [155]  195.33,105.92 90 top
U$257  [217]  195.33,65.41 90 top
U$258  [369]  207.65,108.97 0 top
U$259  [1720]  187.71,65.41 90 top
U$260  [3810]  207.65,106.43 0 top
U$261  [4119]  190.25,65.41 90 top
U$262  [ATP1]  162.94,81.03 0 top
U$263  [MIC0]  208.91,70.74 0 top
U$264  [364]  206.25,70.87 90 bottom
U$265  [373]  212.34,70.87 90 bottom
U$266  [BYP0]  116.97,93.6 0 top
U$267  [#A332]  172.34,65.15 90 top
U$268  [ATP1]  154.05,98.81 0 bottom
U$269  OSHW-LOGOS  [OSHW-LOGO-S]  11.94,165.86 0 bottom
U$270  [BLACKBOARDLOGO#PNG]  47.5,141.22 0 top
U$271  [BLACKBOARDLOGO#PNG]  60.2,159 0 bottom
U$272  [MADEINUSA#PNG]  68.83,152.15 0 bottom
U$273  [QWIIC_COPYRIGHT_SMALL]  104.14,129.79 90 top
U$274  [G1]  14.86,151.26 0 bottom
U$275  [V0]  14.86,156.59 0 bottom
U$276  [D#3]  14.99,153.03 0 bottom
U$277  [D#4]  14.86,154.81 0 bottom
U$278  [ARTEMIS0]  43.43,134.87 0 top
U$279  [ARTEMIS0]  64.52,152.65 0 bottom
U$280  [A160]  70.36,120.02 90 top
U$281  [#48]  65.28,159.38 90 top
U$282  [#229]  62.61,158.37 90 top
U$283  [#2310]  60.2,158.37 90 top
U$284  [#2711]  57.66,158.37 90 top
U$285  [#2812]  55.12,158.37 90 top
U$286  [#A113]  62.74,119 90 top
U$287  [#A294]  60.2,119 90 top
U$288  [#A310]  72.9,119 90 top
U$289  [#A357]  67.82,157.35 90 top
U$290  [#A1214]  48.51,157.35 90 top
U$291  [#A1315]  45.97,157.35 90 top
U$292  [#A3213]  51.05,157.1 90 top
U$293  [A342]  65.28,120.02 90 top
U$294  [MISO8]  40.89,157.1 90 top
U$295  [MOSI7]  43.43,157.1 90 top
U$296  [SCK9]  38.35,157.99 90 top
U$297  [#_#_PWM7]  57.66,156.46 0 top
U$298  [3#3V_MAX2]  60.2,151.38 0 top
U$299  [A_#_ADC6]  58.93,153.92 0 top
U$300  [MEAS3]  38.35,130.3 0 top
U$301  [RX11]  72.77,157.99 90 top
U$302  [TX10]  70.36,157.86 90 top
U$303  [RX01]  22.1,156.97 90 bottom
U$304  [TX00]  19.56,156.97 90 bottom
U$305  [AREF2]  36.32,161.29 0 bottom
U$306  [SCL1]  28.19,157.99 90 top
U$307  [SDA0]  30.73,157.99 90 top
U$308  [#187]  95.76,158.75 90 top
U$309  [#196]  93.22,158.75 90 top
U$310  [#264]  88.14,158.37 90 top
U$311  [#3711]  101.98,157.73 0 top
U$312  [#4213]  100.84,119.25 90 top
U$313  [#4314]  98.3,119.25 90 top
U$314  [#4412]  101.98,155.19 0 top
U$315  [#4518]  88.14,119.25 90 top
U$316  [015]  95.76,119.25 90 top
U$317  [38]  103.89,165.35 0 top
U$318  [81]  80.52,160.4 90 top
U$319  [93]  85.6,160.4 90 top
U$320  [102]  83.06,159.64 90 top
U$321  [116]  93.22,119.25 90 top
U$322  [140]  77.98,159.64 90 top
U$323  [155]  90.68,159.77 90 top
U$324  [217]  90.68,119.25 90 top
U$325  [369]  103,162.81 0 top
U$326  [1720]  83.06,119.25 90 top
U$327  [3810]  103,160.27 0 top
U$328  [4119]  85.6,119.25 90 top
U$329  [ATP1]  58.29,134.87 0 top
U$330  [MIC0]  104.27,124.59 0 top
U$331  [364]  101.6,124.71 90 bottom
U$332  [373]  107.7,124.71 90 bottom
U$333  [BYP0]  12.32,147.45 0 top
U$334  [#A332]  67.69,119 90 top
U$335  [ATP1]  49.4,152.65 0 bottom
U$336  OSHW-LOGOS  [OSHW-LOGO-S]  116.59,165.86 0 bottom
U$337  [BLACKBOARDLOGO#PNG]  152.15,141.22 0 top
U$338  [BLACKBOARDLOGO#PNG]  164.85,159 0 bottom
U$339  [MADEINUSA#PNG]  173.48,152.15 0 bottom
U$340  [QWIIC_COPYRIGHT_SMALL]  208.79,129.79 90 top
U$341  [G1]  119.51,151.26 0 bottom
U$342  [V0]  119.51,156.59 0 bottom
U$343  [D#3]  119.63,153.03 0 bottom
U$344  [D#4]  119.51,154.81 0 bottom
U$345  [ARTEMIS0]  148.08,134.87 0 top
U$346  [ARTEMIS0]  169.16,152.65 0 bottom
U$347  [A160]  175.01,120.02 90 top
U$348  [#48]  169.93,159.38 90 top
U$349  [#229]  167.26,158.37 90 top
U$350  [#2310]  164.85,158.37 90 top
U$351  [#2711]  162.31,158.37 90 top
U$352  [#2812]  159.77,158.37 90 top
U$353  [#A113]  167.39,119 90 top
U$354  [#A294]  164.85,119 90 top
U$355  [#A310]  177.55,119 90 top
U$356  [#A357]  172.47,157.35 90 top
U$357  [#A1214]  153.16,157.35 90 top
U$358  [#A1315]  150.62,157.35 90 top
U$359  [#A3213]  155.7,157.1 90 top
U$360  [A342]  169.93,120.02 90 top
U$361  [MISO8]  145.54,157.1 90 top
U$362  [MOSI7]  148.08,157.1 90 top
U$363  [SCK9]  143,157.99 90 top
U$364  [#_#_PWM7]  162.31,156.46 0 top
U$365  [3#3V_MAX2]  164.85,151.38 0 top
U$366  [A_#_ADC6]  163.58,153.92 0 top
U$367  [MEAS3]  143,130.3 0 top
U$368  [RX11]  177.42,157.99 90 top
U$369  [TX10]  175.01,157.86 90 top
U$370  [RX01]  126.75,156.97 90 bottom
U$371  [TX00]  124.21,156.97 90 bottom
U$372  [AREF2]  140.97,161.29 0 bottom
U$373  [SCL1]  132.84,157.99 90 top
U$374  [SDA0]  135.38,157.99 90 top
U$375  [#187]  200.41,158.75 90 top
U$376  [#196]  197.87,158.75 90 top
U$377  [#264]  192.79,158.37 90 top
U$378  [#3711]  206.63,157.73 0 top
U$379  [#4213]  205.49,119.25 90 top
U$380  [#4314]  202.95,119.25 90 top
U$381  [#4412]  206.63,155.19 0 top
U$382  [#4518]  192.79,119.25 90 top
U$383  [015]  200.41,119.25 90 top
U$384  [38]  208.53,165.35 0 top
U$385  [81]  185.17,160.4 90 top
U$386  [93]  190.25,160.4 90 top
U$387  [102]  187.71,159.64 90 top
U$388  [116]  197.87,119.25 90 top
U$389  [140]  182.63,159.64 90 top
U$390  [155]  195.33,159.77 90 top
U$391  [217]  195.33,119.25 90 top
U$392  [369]  207.65,162.81 0 top
U$393  [1720]  187.71,119.25 90 top
U$394  [3810]  207.65,160.27 0 top
U$395  [4119]  190.25,119.25 90 top
U$396  [ATP1]  162.94,134.87 0 top
U$397  [MIC0]  208.91,124.59 0 top
U$398  [364]  206.25,124.71 90 bottom
U$399  [373]  212.34,124.71 90 bottom
U$400  [BYP0]  116.97,147.45 0 top
U$401  [#A332]  172.34,119 90 top
U$402  [ATP1]  154.05,152.65 0 bottom
Y1  32.768kHz  [CRYSTAL-SMD-3.2X1.5MM]  90.42,28.07 90 top
Y2  32.768kHz  [CRYSTAL-SMD-3.2X1.5MM]  195.07,28.07 90 top
Y3  32.768kHz  [CRYSTAL-SMD-3.2X1.5MM]  90.42,81.92 90 top
Y4  32.768kHz  [CRYSTAL-SMD-3.2X1.5MM]  195.07,81.92 90 top
Y5  32.768kHz  [CRYSTAL-SMD-3.2X1.5MM]  90.42,135.76 90 top
Y6  32.768kHz  [CRYSTAL-SMD-3.2X1.5MM]  195.07,135.76 90 top

## Library data of the parts
BT1-BT6 = SparkFun-Batteries; PROD_ID: PRT-11892; SF_SKU: BATT-10373
C1 C32 C51 C70 C89 C108 = SparkFun-Capacitors; PROD_ID: CAP-07888
C2 C4 C10 C12 C14 C18 C19 C21 C24 C25 C31 C38 C39 C41 C44 C45 C50 C57 C58 C60 C63 C64 C69 C76 C77 C79 C82 C83 C88 C95 C96 C98 C101 C102 C107 C114 = SparkFun-Capacitors; PROD_ID: CAP-00810
C3 C6 C15 C20 C26 C27 C40 C46 C47 C59 C65 C66 C78 C84 C85 C97 C103 C104 = SparkFun-Capacitors; PROD_ID: CAP-00811
C5 C22 C42 C61 C80 C99 = SparkFun-Capacitors; PROD_ID: CAP-08478
C7 C33 C52 C71 C90 C109 = SparkFun-Capacitors; PROD_ID: CAP-11015
C8 C23 C43 C62 C81 C100 = SparkFun-Capacitors; PROD_ID: CAP-08604
C9 C16 C29 C34 C48 C53 C67 C72 C86 C91 C105 C110 = SparkFun-Capacitors; PROD_ID: CAP-00868
C11 C13 C35 C36 C54 C55 C73 C74 C92 C93 C111 C112 = SparkFun-Capacitors; PROD_ID: CAP-07881
C17 C30 C49 C68 C87 C106 = SparkFun-Capacitors; PROD_ID: CAP-00867
C28 C37 C56 C75 C94 C113 = SparkFun-Capacitors; PROD_ID: CAP-07886
D1 D6 D11 D16 D21 D26 = SparkFun-DiscreteSemi; PROD_ID: DIO-08053
D2 D8 D13 D18 D23 D28 LED2 LED3 LED5 LED7 LED9 LED11 = SparkFun-LED; PROD_ID: DIO-09910
D3 D7 D12 D17 D22 D27 = SparkFun-LED; PROD_ID: DIO-09909
D4 D5 D9 D10 D14 D15 D19 D20 D24 D25 D29 D30 = SparkFun-DiscreteSemi; PROD_ID: DIO-11623
E1-E6 = SparkFun-Sensors; PROD_ID: IC-14361
E$1-E$4 JP1 JP7 JP31 JP32 JP53 JP54 JP75 JP76 JP97 JP98 JP119 JP120 U$5 U$16 U$135 U$202 U$269 U$336 = SparkFun-Aesthetics
E$5 E$6 = SparkFun-Retired
F1-F6 = SparkFun-Fuses; PROD_ID: RES-14313
FRAME1-FRAME6 = SparkFun-Aesthetics; DESIGNER: Nobody; VERSION: v01
IC1-IC6 = Testing; PROD_ID: VREG-08170
J1 J2 J6 J7 J11-J14 J18-J21 J25-J28 J32-J35 J39-J42 JP14 JP34 JP56 JP78 JP100 JP122 TP1-TP30 = SparkFun-Connectors
J3 J8 J15 J22 J29 J36 = SparkFun-Connectors; PROD_ID: CONN-08106; SF_ID: PRT-12748
J4 J9 J16 J23 J30 J37 = SparkFun-Connectors; PROD_ID: CONN-13694
J5 J10 J17 J24 J31 J38 = SparkFun-Connectors; PROD_ID: CONN-14122; VALUE: USB Female Type C Connector
JP2 JP29 JP51 JP73 JP95 JP117 = SparkFun-Connectors; PROD_ID: CONN-11219
JP3-JP6 JP8 JP9 JP17 JP18 JP23-JP28 JP41 JP42 JP45-JP50 JP63 JP64 JP67-JP72 JP85 JP86 JP89-JP94 JP107 JP108 JP111-JP116 JP129 JP130 = SparkFun
JP10 JP11 JP13 JP19 JP20 JP30 JP33 JP38-JP40 JP52 JP55 JP60-JP62 JP74 JP77 JP82-JP84 JP96 JP99 JP104-JP106 JP118 JP121 JP126-JP128 = SparkFun-Connectors; PROD_ID: CONN-10204
JP12 JP15 JP16 JP21 JP22 JP35-JP37 JP43 JP44 JP57-JP59 JP65 JP66 JP79-JP81 JP87 JP88 JP101-JP103 JP109 JP110 JP123-JP125 JP131 JP132 = SparkFun-Jumpers
LED1 LED4 LED6 LED8 LED10 LED12 = SparkFun-LED; PROD_ID: DIO-09911
Q1-Q6 = SparkFun-DiscreteSemi; PROD_ID: TRANS-08285
R1 R6 R12 R16 R19 R20 R25 R31 R32 R37 R43 R44 R49 R55 R56 R61 R67 R68 = SparkFun-Resistors; PROD_ID: RES-07857
R2 R4 R9 R10 R13 R23 R26 R28 R35 R38 R40 R47 R50 R52 R59 R62 R64 R71 = SparkFun-Resistors; PROD_ID: RES-00824
R3 R5 R11 R24 R27 R36 R39 R48 R51 R60 R63 R72 = SparkFun-Resistors; PROD_ID: RES-07828
R7 R8 R21 R22 R33 R34 R45 R46 R57 R58 R69 R70 = SparkFun-Resistors; PROD_ID: RES-12083
R14 R17 R29 R41 R53 R65 = SparkFun-Resistors; PROD_ID: RES-07850
R15 R18 R30 R42 R54 R66 = SparkFun-Resistors; PROD_ID: RES-07849
S1-S6 = SparkFun-Switches; PROD_ID: SWCH-14139
U1 U3 U7 U10 U13 U16 = SparkFun-PowerIC; PROD_ID: VREG-12457
U2 U5 U8 U11 U14 U17 = SparkFun-IC-Comms; PROD_ID: IC-14038
U4 U6 U9 U12 U15 U18 = Testing
U$1 U$3 U$6 U$7 U$136 U$137 U$203 U$204 U$270 U$271 U$337 U$338 = blackboardlogo
U$2 U$10 U$75 U$76 U$142 U$143 U$209 U$210 U$276 U$277 U$343 U$344 = buzzard_labels (14)
U$4 U$8 U$138 U$205 U$272 U$339 = madeinusa
U$9 U$65 U$139 U$206 U$273 U$340 = Labels
U$11 U$12 U$63 U$64 U$68 U$73 U$74 U$130-U$132 U$140 U$141 U$197-U$199 U$207 U$208 U$264-U$266 U$274 U$275 U$331-U$333 U$341 U$342 U$398-U$400 = buzzard_labels (13)
U$13 U$18 U$22 U$105 U$106 U$133 U$172 U$173 U$200 U$239 U$240 U$267 U$306 U$307 U$334 U$373 U$374 U$401 = buzzard_labels (6)
U$14 U$15 U$49 U$53 U$77 U$78 U$102 U$103 U$144 U$145 U$169 U$170 U$211 U$212 U$236 U$237 U$278 U$279 U$303 U$304 U$345 U$346 U$370 U$371 = buzzard_labels (3)
U$17 U$79 U$146 U$213 U$280 U$347 = buzzard_labels
U$19 U$21 U$25-U$27 U$29-U$31 U$33-U$36 U$38 U$80-U$92 U$147-U$159 U$214-U$226 U$281-U$293 U$348-U$360 = buzzard_labels (1)
U$20 U$104 U$171 U$238 U$305 U$372 = buzzard_labels (5)
U$23 U$24 U$32 U$37 U$39-U$46 U$51 U$52 U$54-U$60 U$107-U$127 U$174-U$194 U$241-U$261 U$308-U$328 U$375-U$395 = buzzard_labels (9)
U$28 U$61 U$128 U$134 U$195 U$201 U$262 U$268 U$329 U$335 U$396 U$402 = buzzard_labels (12)
U$47 U$48 U$50 U$93-U$95 U$160-U$162 U$227-U$229 U$294-U$296 U$361-U$363 = buzzard_labels (8)
U$62 U$129 U$196 U$263 U$330 U$397 = buzzard_labels (11)
U$66 U$67 U$69-U$72 U$96-U$101 U$163-U$168 U$230-U$235 U$297-U$302 U$364-U$369 = buzzard_labels (2)
Y1-Y6 = SparkFun-Clocks; PROD_ID: XTAL-13062